# Altium PCB PCB_EXAMPLE.PcbDoc
Units mm, origin at the board's own origin, x right, y up, seen from the top; angles counter-clockwise.
Board outline 184 x 161.42 mm, 2 copper layers (Top Layer, Bottom Layer); 54 components, 42 nets, 224 pads, 11 vias.
Unrouted connection lines stored in the file: 49.
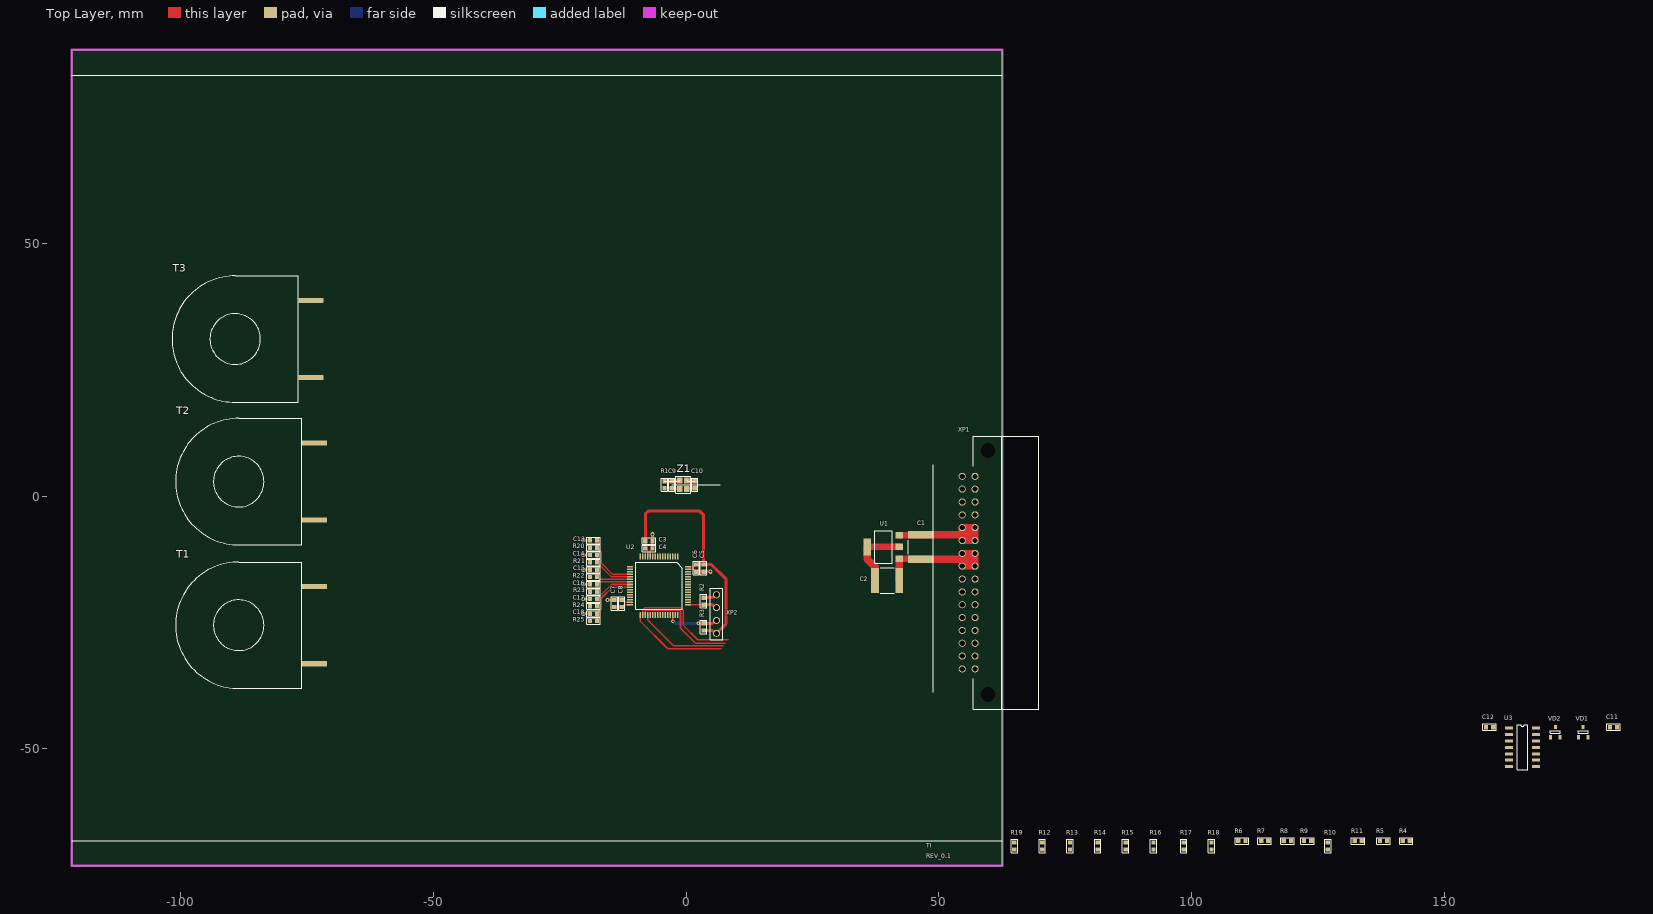
[diagram p0: Top Layer view]
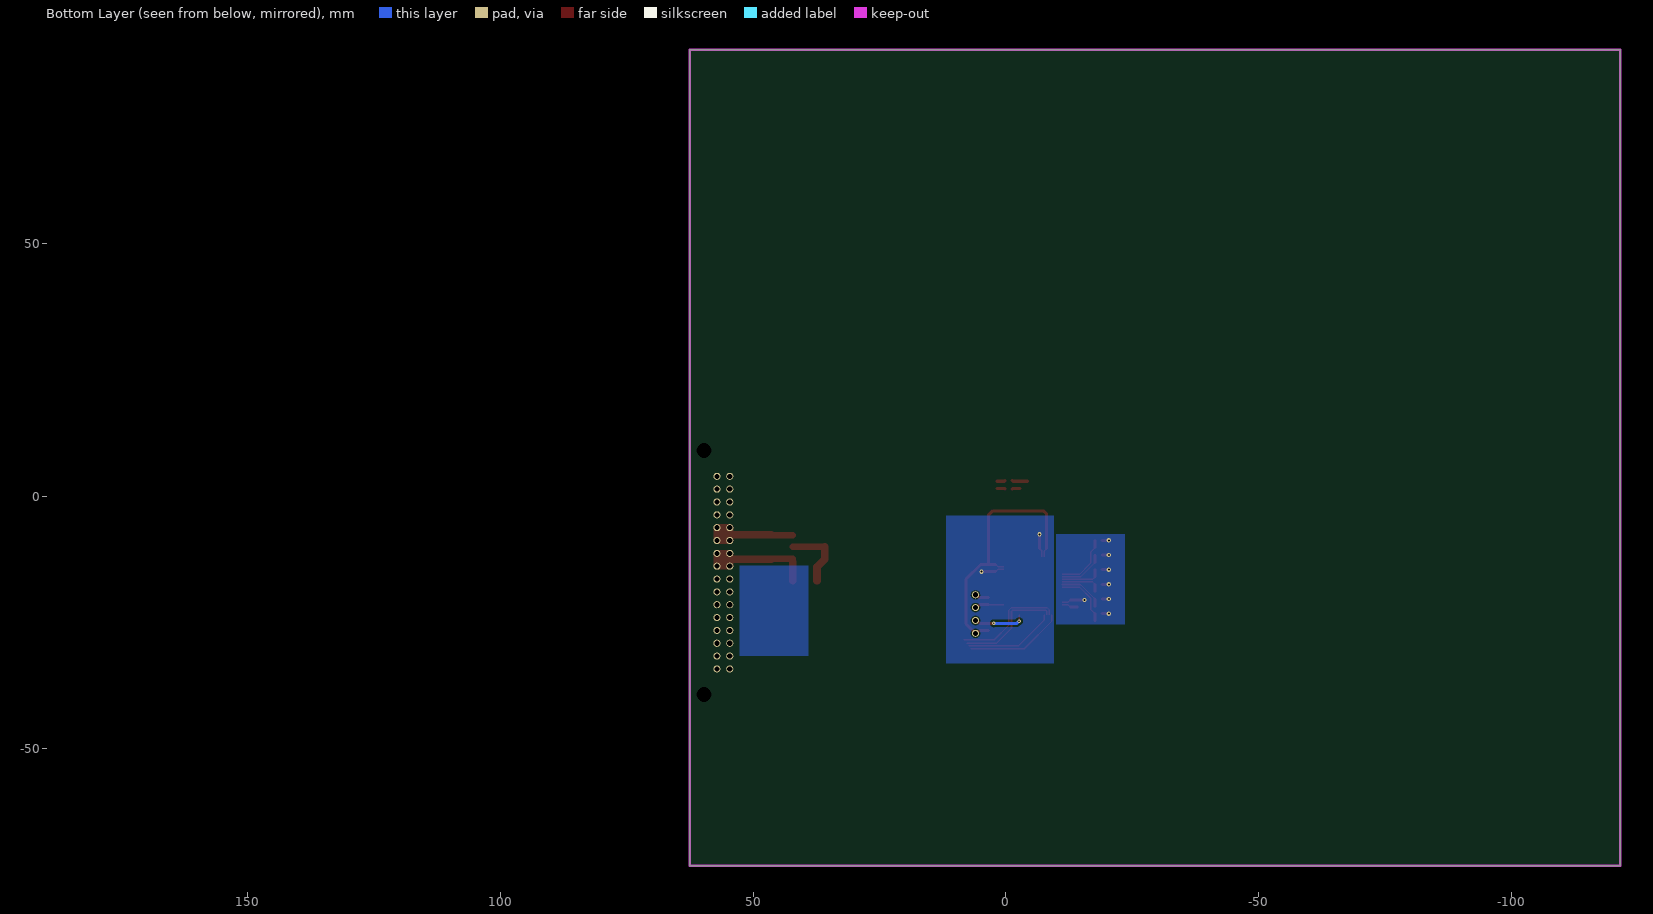
[diagram p1: Bottom Layer view, seen from below]

## Layer stack, top to bottom
Top Solder: solder mask 0.0102, Solder Resist, Dk 3.5
Top Layer: signal copper 0.0356
Dielectric 1: dielectric 0.32, FR-4, Dk 4.8
Bottom Layer: signal copper 0.0356
Bottom Solder: solder mask 0.0102, Solder Resist, Dk 3.5

## Board outline
-121.496,-73.136 -121.496,88.286 62.504,88.286 62.504,-71.986 62.504,-73.136

## Design rules (kind name [scope] priority, off if disabled: settings)
BoardOutlineClearance [All] p1: gap=0.3 ignorepadtopadclearanceinfootprint=FALSE
Clearance Clearance_MultiLayerPad [OnLayer('Multi-Layer') and IsPad] p1: gap=0.2 ignorepadtopadclearanceinfootprint=FALSE except(0: Arc-Hole Track-Hole SMDPad-Hole THPad-Hole Via-Hole Fill-Hole Poly-Hole Region-Hole Text-Hole)
Clearance Clearance_Polygon [InPolygon] p2: gap=0.4 ignorepadtopadclearanceinfootprint=FALSE except(0: Arc-Hole Track-Hole SMDPad-Hole THPad-Hole Via-Hole Fill-Hole Poly-Hole Region-Hole Text-Hole)
Clearance [All] p3: gap=0.1 ignorepadtopadclearanceinfootprint=FALSE except(0: Arc-Hole Track-Hole SMDPad-Hole THPad-Hole Via-Hole Fill-Hole Poly-Hole Region-Hole Text-Hole)
ComponentClearance [All] p1: gap=0 collisioncheckmode=3 verticalgap=0 showdistances=FALSE
DiffPairsRouting [All] p1: maxlimit=0.3 minlimit=0.1 mostfreqgap=0.15 toplayer_minwidth=0.1 toplayer_maxwidth=0.3 toplayer_prefwidth=0.15 bottomlayer_minwidth=0.1 bottomlayer_maxwidth=0.3 bottomlayer_prefwidth=0.15 maxuncoupledlength=12.7
Height [All] p1: minheight=0 maxheight=50 prefheight=12.7
HoleSize [All] p1: absolutevalues=TRUE maxlimit=10 minlimit=0.3 maxpercent=80.000 minpercent=20.000
HoleToHoleClearance [All] p1: gap=0.3 allowstackedmicrovias=TRUE
MinimumSolderMaskSliver [All] p1: minsoldermaskwidth=0.2
PlaneClearance [All] p1: clearance=0.5
PlaneConnect [All] p1: planeconnectstyle=Relief reliefexpansion=0.5 reliefentries=4 reliefconductorwidth=0.2 reliefairgap=0.2
PolygonConnect PolygonConnect_PadGND [InNet('GND') and IsPad] p1: connectstyle=Relief reliefconductorwidth=0.2 reliefentries=4 polygonreliefangle="90 Angle" airgapwidth=0.2
PolygonConnect PolygonConnect_Via [IsVia] p2: connectstyle=Direct reliefconductorwidth=0.254 reliefentries=4 polygonreliefangle="90 Angle" airgapwidth=0.254
PolygonConnect [All] p3: connectstyle=Relief reliefconductorwidth=0.2 reliefentries=4 polygonreliefangle="90 Angle" airgapwidth=0.2
RoutingVias [All] p1: holewidth=0.2 width=0.4 viastyle="Through Hole" minholewidth=0.2 minwidth=0.4 maxholewidth=0.5 maxwidth=1.2
SilkToSolderMaskClearance [IsPad] p1: minsilkscreentomaskgap=0.2 clearancetoexposedcopper=TRUE
SolderMaskExpansion [All] p1: expansion=0.075 istentingtop=FALSE
Width [All] p1: maxlimit=10 minlimit=0.1 preferedwidth=0.1
21 further rules are at their usual default settings.

## Classes and differential pairs
component class U_TI_POW: C1 C2 C3 C4 C5 C6 C7 C8 U1 XP1
component class U_TI_MCU: C9 C10 R1 R2 R3 R? U2 XP2 Z1 Z?
component class U_TI_ADC_VOLTAGE: C11 C12 C13 C14 C15 C16 C17 C18 R4 R5 R6 R7 R8 R9 R10 R11 R12 R13 R14 R15 R16 R17 R18 R19 R20 R21 R22 R23 R24 R25 R? T1 T2 T3 U3 VD1 VD2

## Components (designator, comment, footprint, x,y, rotation, side; value= is the part's Value field where it differs from the comment)
C1 "Cap_2220" "CAP: 2220" 46.425,-12.445 r180 top value=10μF
C2 "Cap_2220" "CAP: 2220" 42.175,-16.695 r270 top value=10μF
C3 "Cap_0603" "CAP: 0603" -7.35,-8.9 r180 top value=4.7μF
C4 "Cap_0603" "CAP: 0603" -7.35,-10.35 r180 top value=0.1μF
C5 "Cap_0603" "CAP: 0603" 3.475,-14.225 r90 top value=4.7μF
C6 "Cap_0603" "CAP: 0603" 2.025,-14.225 r90 top value=0.1μF
C7 "Cap_0603" "CAP: 0603" -14.175,-21.225 r270 top value=1μF
C8 "Cap_0603" "CAP: 0603" -12.725,-21.225 r270 top value=0.01μF
C9 "Cap_0603" "CAP: 0603" -2.825,2.25 r90 top value=20pF
C10 "Cap_0603" "CAP: 0603" 1.725,2.25 r90 top value=20pF
C11 "Cap_0603" "CAP: 0603" 183.442,-45.685 r0 top value=??μF
C12 "Cap_0603" "CAP: 0603" 158.942,-45.685 r0 top value=??μF
C13 "Cap_0603" "CAP: 0603" -18.306,-8.743 r180 top value=??μF
C14 "Cap_0603" "CAP: 0603" -18.306,-11.643 r180 top value=??μF
C15 "Cap_0603" "CAP: 0603" -18.306,-14.543 r180 top value=??μF
C16 "Cap_0603" "CAP: 0603" -18.306,-17.443 r180 top value=??μF
C17 "Cap_0603" "CAP: 0603" -18.306,-20.343 r180 top value=??μF
C18 "Cap_0603" "CAP: 0603" -18.306,-23.243 r180 top value=??μF
R1 "Resistor_0603" "RES: 0603" -4.275,2.25 r270 top value=390
R2 "Resistor_0603" "RES: 0603" 3.475,-20.775 r270 top value=10K
R3 "Resistor_0603" "RES: 0603" 3.475,-25.855 r270 top value=10K
R4 "Resistor_0603" "RES: 0603" 142.441,-68.185 r0 top value=??R
R5 "Resistor_0603" "RES: 0603" 137.941,-68.185 r0 top value=63.4K
R6 "Resistor_0603" "RES: 0603" 109.941,-68.185 r0 top value=158K
R7 "Resistor_0603" "RES: 0603" 114.441,-68.185 r0 top value=158K
R8 "Resistor_0603" "RES: 0603" 118.941,-68.185 r0 top value=158K
R9 "Resistor_0603" "RES: 0603" 122.941,-68.185 r0 top value=158K
R10 "Resistor_0603" "RES: 0603" 126.941,-69.185 r90 top value=63.4K
R11 "Resistor_0603" "RES: 0603" 132.941,-68.185 r0 top value=63.4K
R12 "Resistor_0603" "RES: 0603" 70.442,-69.185 r90 top value=158K
R13 "Resistor_0603" "RES: 0603" 75.942,-69.185 r90 top value=158K
R14 "Resistor_0603" "RES: 0603" 81.442,-69.185 r90 top value=158K
R15 "Resistor_0603" "RES: 0603" 86.942,-69.185 r90 top value=158K
R16 "Resistor_0603" "RES: 0603" 92.441,-69.185 r90 top value=63.4K
R17 "Resistor_0603" "RES: 0603" 98.441,-69.185 r90 top value=63.4K
R18 "Resistor_0603" "RES: 0603" 103.941,-69.185 r90 top value=63.4K
R19 "Resistor_0603" "RES: 0603" 64.942,-69.185 r90 top value=??R
R20 "Resistor_0603" "RES: 0603" -18.306,-10.193 r180 top value=??R
R21 "Resistor_0603" "RES: 0603" -18.306,-13.093 r180 top value=??R
R22 "Resistor_0603" "RES: 0603" -18.306,-15.993 r180 top value=??R
R23 "Resistor_0603" "RES: 0603" -18.306,-18.893 r180 top value=??R
R24 "Resistor_0603" "RES: 0603" -18.306,-21.793 r180 top value=??R
R25 "Resistor_0603" "RES: 0603" -18.306,-24.693 r180 top value=??R
T1 "AC-1005" AC-1005 -88.475,-25.525 r90 top
T2 "AC-1005" AC-1005 -88.475,2.875 r90 top
T3 "AC-1005" AC-1005 -89.175,31.075 r90 top
U1 "MCP600LD1117S33CTR4" SOT-223-3 39.025,-10.045 r90 top
U2 "STM32F030R8T6TR" LQFP-64 -5.35,-17.725 r270 top
U3 "MCP6004" SOIC-14 165.442,-49.685 r0 top
VD1 "BAV99" SOT-23-3 177.442,-46.685 r0 top
VD2 "BAV99" SOT-23-3 171.942,-46.685 r0 top
XP1 "DS1118-32M-R23" DS1118-32M-R23 57.165,-34.175 r90 top
XP2 "PLS-6 (DS1021-1x6)" "PLS-4 (DS1021-1x4)" 6.02,-23.315 r0 top
Z1 "ECS-320-10-36B2-CTN-TR" "OSC: 2520" 0.15,1.4 r90 top value=32MHz

## Footprints (in the part's own frame and the unit in brackets; to place one, negate y for a bottom-side part, rotate by r counter-clockwise, add the part's x,y. Pads: shape width x height; smd on the part's side, far side on the other; paste and mask are expansions set on the pad)
AC-1005 [mm] "AC-1005"
  rect 1x5 smd: 1(-7.62,-15) 2(7.62,-15)
  silkscreen extent -12.5,-12.5 12.5,12.5, body extent -11.91,-17.5 11.91,11.93, height 9.8
"CAP: 0603" [mm]
  rect 0.85x0.85 smd: 1(-0.7,0) 2(0.7,0)
  silkscreen extent -1.33,-0.63 1.33,0.63, body extent -0.8,-0.4 0.8,0.4, height 0.3
"CAP: 2220" [mm]
  rect 5x1.5 smd: 1(0,0) 2(0,-4.8)
  silkscreen extent -2.5,-3.75 2.5,-1, body extent -2.5,-5.25 2.5,0.45, height 2.3
DS1118-32M-R23 [mm] "DS1118-32M-R23"
  round 1.4 hole 1: 1(0,0) 2(2.54,0) 3(5.08,0) 4(7.62,0) 5(10.16,0) 6(12.7,0) 7(15.24,0) 8(17.78,0) 9(20.32,0) 10(22.86,0) 11(25.4,0) 12(27.94,0) 13(30.48,0) 14(33.02,0) 15(35.56,0) 16(38.1,0) 17(38.1,2.54) 18(35.56,2.54) 19(33.02,2.54) 20(30.48,2.54) 21(27.94,2.54) 22(25.4,2.54) 23(22.86,2.54) 24(20.32,2.54) 25(17.78,2.54) 26(15.24,2.54) 27(12.7,2.54) 28(10.16,2.54) 29(7.62,2.54) 30(5.08,2.54) 31(2.54,2.54) 32(0,2.54)
  round 2 hole 3: ""(-5.08,-2.54) ""(43.18,-2.54)
  silkscreen extent -7.95,-12.64 46.05,0.36, body extent -7.95,-12.64 46.05,2.84, height 6.87
LQFP-64 [mm] "LQFP-64"
  rect 1.2x0.3 smd: 1(-5.75,3.75) 2(-5.75,3.25) 3(-5.75,2.75) 4(-5.75,2.25) 5(-5.75,1.75) 6(-5.75,1.25) 7(-5.75,0.75) 8(-5.75,0.25) 9(-5.75,-0.25) 10(-5.75,-0.75) 11(-5.75,-1.25) 12(-5.75,-1.75) 13(-5.75,-2.25) 14(-5.75,-2.75) 15(-5.75,-3.25) 16(-5.75,-3.75) 33(5.75,-3.75) 34(5.75,-3.25) 35(5.75,-2.75) 36(5.75,-2.25) 37(5.75,-1.75) 38(5.75,-1.25) 39(5.75,-0.75) 40(5.75,-0.25) 41(5.75,0.25) 42(5.75,0.75) 43(5.75,1.25) 44(5.75,1.75) 45(5.75,2.25) 46(5.75,2.75) 47(5.75,3.25) 48(5.75,3.75)
  rect 0.3x1.2 smd: 17(-3.75,-5.75) 18(-3.25,-5.75) 19(-2.75,-5.75) 20(-2.25,-5.75) 21(-1.75,-5.75) 22(-1.25,-5.75) 23(-0.75,-5.75) 24(-0.25,-5.75) 25(0.25,-5.75) 26(0.75,-5.75) 27(1.25,-5.75) 28(1.75,-5.75) 29(2.25,-5.75) 30(2.75,-5.75) 31(3.25,-5.75) 32(3.75,-5.75) 49(3.75,5.75) 50(3.25,5.75) 51(2.75,5.75) 52(2.25,5.75) 53(1.75,5.75) 54(1.25,5.75) 55(0.75,5.75) 56(0.25,5.75) 57(-0.25,5.75) 58(-0.75,5.75) 59(-1.25,5.75) 60(-1.75,5.75) 61(-2.25,5.75) 62(-2.75,5.75) 63(-3.25,5.75) 64(-3.75,5.75)
  silkscreen extent -4.61,-4.61 4.61,4.61, body extent -6,-6 6,6, height 1.61
"OSC: 2520" [mm]
  rect 1.2x1.1 smd: 1(0,0) 2(1.7,0) 3(1.7,1.4) 4(0,1.4)
  round 0.5 on Mech1: 5(-0.075,0.025)
  round 0.5 on Top Overlay: ""(-1.275,-0.6)
  silkscreen extent -0.8,-0.75 2.5,2.15, body extent -0.45,-0.35 2.15,1.75, height 0.55
"PLS-4 (DS1021-1x4)" [mm] "PLS-4 (DS1021-1x4)"
  round 1.4 hole 1: 1(0,3.81) 2(0,1.27) 3(0,-1.27) 4(0,-3.81)
  silkscreen extent -1.27,-5.08 1.27,5.08, body extent -1.27,-5.08 1.27,5.08, height 8.61
"RES: 0603" [mm]
  rect 0.85x0.85 smd: 1(-0.7,0) 2(0.7,0)
  silkscreen extent -1.33,-0.63 1.33,0.63, body extent -0.8,-0.4 0.8,0.4, height 0.44
SOIC-14 [mm] "SOIC-14"
  rect 1.6x0.6 smd: 1(-2.7,3.81) 2(-2.7,2.54) 3(-2.7,1.27) 4(-2.7,0) 5(-2.7,-1.27) 6(-2.7,-2.54) 7(-2.7,-3.81) 8(2.7,-3.81) 9(2.7,-2.54) 10(2.7,-1.27) 11(2.7,0) 12(2.7,1.27) 13(2.7,2.54) 14(2.7,3.81)
  silkscreen extent -1.07,-4.44 1.07,4.44, body extent -3,-4.33 3,4.33, height 1.75
SOT-23-3 [mm] "SOT-23-3"
  rect 0.6x0.8 smd: 1(-0.95,-1) 2(0.95,-1) 3(0,1)
  silkscreen extent -1,-0.25 1,0.25, body extent -1.45,-1.25 1.45,1.15, height 0.96
SOT-223-3 [mm] "SOT-223-3"
  rect 1.3x1.5 smd: 1(-2.3,-3.15) 2(0,-3.15) 3(2.3,-3.15)
  rect 3.3x1.5 smd: 4(0,3.15)
  silkscreen extent -3.25,-1.75 3.25,1.75, body extent -3.25,-3.5 3.25,3.5, height 1.81

## Part data
C1 C2: Package/Case=2220, Temperature=-55...+125°C(-55...+85°C), TypeDielectric=X7R(X5R), Voltage=16V, Product Category=Capacitors
C3 C5: Package/Case=0603, Temperature=-55...+125°C(-55...+85°C), TypeDielectric=X7R(X5R), Voltage=25V, Product Category=Capacitors
C4 C6 C7: Package/Case=0603, Temperature=-55...+125°C(-55...+85°C), TypeDielectric=X7R(X5R), Voltage=16V, Product Category=Capacitors
C8 C9 C10: Package/Case=0603, Temperature=-55...+125°C(-55...+85°C), TypeDielectric=X7R(X5R), Voltage=50V, Product Category=Capacitors
C11 C12 C13 C14 C15 C16 C17 C18: Package/Case=0603, Temperature=-55...+125°C(-55...+85°C), TypeDielectric=X7R(X5R), Voltage=??V, Product Category=Capacitors
R1 R2 R3: Package/Case=0603, Power=0.1W, Temperature=-55...+125°C, Tolerance=±1%, Product Category=Resistors
R4 R5 R6 R7 R8 R9 R10 R11 R12 R13 R14 R15 R16 R17 R18 R19 R20 R21 R22 R23 R24 R25: Package/Case=0603, Power=0.1W, Temperature=-55...+125°C, Tolerance=±5%, Product Category=Resistors
T1 T2 T3: "Current Transformer, primary current: 5A", Manufacturer=Talema, Analogue=CST-1005(https://eu.mouser.com/datasheet/2/410/CST_1005-1892657.pdf), Datasheet=https://static.chipdip.ru/lib/884/DOC003884697.pdf, HelpURL=https://www.chipdip.ru/product/ac-1005, Product Category="Current Transformers"
U1: library part LD1117S33CTR, "LDO Voltage Regulator 3.3V 0.8A Positive", Manufacturer=STMicroelectronics, Package/Case=SOT-223-3, Datasheet=https://eu.mouser.com/datasheet/2/389/cd00000544-1795431.pdf, HelpURL=https://eu.mouser.com/ProductDetail/STMicroelectronics/LD1117S33CTR?qs=8u%2FLf1IQwKF9meFZLHfRog%3D%3D, Product Category="Voltage Regulators"
U2: "MCU Mainstream Arm Cortex-M0 Value line MCU 64 Kbytes of Flash , 48 MHz CPU", Manufacturer=STMicroelectronics, Package/Case=LQFP-64, Datasheet=https://www.st.com/resource/en/datasheet/stm32f030r8.pdf, HelpURL=https://eu.mouser.com/ProductDetail/STMicroelectronics/STM32F030R8T6TR?qs=s5SkPsIz10%252B%252B1w15QiyTpQ%3D%3D, Product Category=Microcontrollers
U3: "1 MHz, Low-Power Op Amp", Manufacturer=Microchip, Package/Case=SOIC-14, Datasheet=https://eu.mouser.com/ProductDetail/Microchip-Technology-Atmel/MCP6004-I-SL?qs=n%2FfJlMG9rCZ2%2F%2FCryvZ52w%3D%3D, HelpURL=https://eu.mouser.com/ProductDetail/Microchip-Technology-Atmel/MCP6004-I-SL?qs=n%2FfJlMG9rCZ2%2F%2FCryvZ52w%3D%3D, Product Category="Operational Amplifiers"
VD1 VD2: "High-speed switching diode", Manufacturer=Nexperia, Package/Case=SOT-23, Datasheet=https://eu.mouser.com/datasheet/2/916/BAV99_SER-1370693.pdf, HelpURL=https://eu.mouser.com/ProductDetail/Nexperia/BAV99235?qs=me8TqzrmIYWUP4h8SbZlfQ%3D%3D, Product Category=Diodes
XP1: "DIN 41612 Connector", Manufacturer=Connfly, Analogue="HARTING 09221326951(https://eu.mouser.com/ProductDetail/HARTING/09221326951?qs=Afqhj6cPmO9f0oVZo6yWiA%3D%3D)", Datasheet=http://en.connfly.group/static/upload/file/pdf/DS1118.pdf, HelpURL=https://www.chipdip.by/product/din41612r-ds1118-32m-r23, Product Category=Connectors
XP2: library part "PLS-4 (DS1021-1x4)", "Board to Board, Surface Mount, Single row, 6 Positions, 2.54mm, Vertical.", Manufacturer=Connfly, Datasheet=https://static.chipdip.ru/lib/977/DOC005977245.pdf, HelpURL=https://www.chipdip.by/product/pls-4, Product Category=Connectors
Z1: "Crystal 32.000 MHz 10 pF +/-10 +/-20 -40 +85 C +/-2 ppm Max.", Manufacturer=ECS, Package/Case=2520, Temperature=-40...+85°C, Datasheet=https://eu.mouser.com/datasheet/2/122/ECX_2236B2-2400583.pdf, HelpURL=https://eu.mouser.com/ProductDetail/ECS/ECS-320-10-36B2-CTN-TR?qs=QNEnbhJQKvbusIFiAH6chw%3D%3D, Product Category=Crystals

## Via types
v1: diameter 0.85, hole 0.4, Top Layer to Bottom Layer, 9 vias
v2: diameter 0.7, hole 0.35, Top Layer to Bottom Layer, 2 vias

## Nets (pads, with @x,y where several pads share a name; then routed paths per layer and width w, separated by ;. In a path a pad name is that pad's centre, name@x,y a point inside that pad or via, vN(x,y) a via of type N, cw(c..) or ccw(c..) an arc to the next point about the centre after c; other vN are vias at no path point)
+3V3: C2.2 C3.2 C4.2 C5.2 C6.2 C7.2 C8.2 R3.2 U1.2 U1.4 U2.1 U2.7 U2.13 U2.32 U2.64 XP2.4 | length 70.5
  Top Layer w0.3: C8.2 -12.275,-21.475 U2.32 ; C4.2 -7.6,-10.8 U2.13 ; U2.64 1.575,-13.975 C6.2
  Top Layer w0.6: C7.2 C8.2 ; C4.2 -8.05,-3.55 -7.4,-2.9 2.6,-2.9 3.475,-3.775 C5.2 ; C6.2 C5.2 ; R3.2 5.233,-26.555 5.804,-27.125 XP2.4 7.922,-25.223 7.922,-16.461 4.986,-13.525 C5.2
  Top Layer w1.3: U1.4 U1.2
  Top Layer w1.5: U1.4 35.875,-12.516 37.375,-14.016 C2.2
+5V: C1.2 U1.3 U3.4 XP1.11 XP1.12 XP1.21 XP1.22 | length 22.5
  Top Layer w1.2: C1.2@46.325,-7.745 C1.2
  Top Layer w1.3: U1.3 C1.2@46.325,-7.745
  Top Layer w1.4: XP1.22 54.625,-7.505 XP1.21 XP1.12 XP1.11 XP1.22
  Top Layer w1.5: C1.2 54.485,-7.645
ADC_IN4: C13.1 R20.1 U2.20 | length 11.4
  Top Layer w0.3: R20.1@-17.606,-10.207 -16.757,-11.056 -16.757,-13.249 -14.531,-15.475 U2.20
  Top Layer w0.6: R20.1@-17.606,-10.182 C13.1
ADC_IN5: C14.1 R21.1 U2.21 | length 9.2
  Top Layer w0.3: R21.1@-17.606,-13.134 R21.1 ; R21.1@-17.606,-13.107 -14.738,-15.975 U2.21
  Top Layer w0.6: R21.1 C14.1
ADC_IN6: C15.1 R22.1 U2.22 | length 8.2
  Top Layer w0.3: R22.1@-17.606,-16.007 -17.138,-16.475 U2.22
  Top Layer w0.6: R22.1 C15.1
ADC_IN7: C16.1 R23.1 U2.23 | length 8.2
  Top Layer w0.3: C16.1 -17.138,-16.975 U2.23
  Top Layer w0.6: R23.1 C16.1
ADC_IN14: C17.1 R24.1 U2.24 | length 9.1
  Top Layer w0.3: C17.1 -14.738,-17.475 U2.24
  Top Layer w0.6: R24.1 C17.1
ADC_IN15: C18.1 R25.1 U2.25 | length 11.4
  Top Layer w0.3: C18.1 -16.757,-22.394 -16.757,-20.201 -14.531,-17.975 U2.25
  Top Layer w0.6: R25.1 C18.1
GND: C1.1 C2.1 C3.1 C4.1 C5.1 C6.1 C7.1 C8.1 C9.1 C10.2 C11.2 C12.2 C13.2 C14.2 C15.2 C16.2 C17.2 C18.2 R2.1 U1.1 U2.12 U2.31 U2.60 U2.63 U3.11 XP1.9 XP1.10 XP1.23 XP1.24 XP2.1 Z1.2 Z1.4 | length 54.2
  Top Layer w0.3: C8.1 -12.275,-20.975 U2.31 ; U2.12 -7.1,-10.8 C4.1 ; U2.63 1.575,-14.475 C6.1
  Top Layer w0.6: v1(-20.356,-23.243) C18.2 ; v1(-20.356,-20.343) C17.2 ; v1(-20.356,-17.443) C16.2 ; v1(-20.356,-14.543) C15.2 ; v1(-20.356,-11.643) C14.2 ; v1(-20.356,-8.743) C13.2 ; v1(-15.525,-20.525) C7.1 C8.1 ; C4.1 C3.1 v1(-6.65,-7.55) ; C9.1 -1.4,1.55 Z1.4 ; Z1.2 0.3,2.95 C10.2 ; C6.1 C5.1 v1(4.825,-14.925) ; R2.1 5.234,-20.075 5.804,-19.505 XP2.1
  Top Layer w1.3: U1.1 46.325,-12.345 C1.1
  Top Layer w1.4: XP1.24 XP1.23 XP1.10 XP1.9 XP1.24
  Top Layer w1.5: C2.1 42.175,-12.995 ; C1.1 54.485,-12.445
NetC9_2: C9.2 R1.1 Z1.3 | length 3.1
  Top Layer w0.6: R1.1 C9.2 -1.4,2.95 Z1.3
NetC11_1: C11.1 R4.1
NetC12_1: C12.1 R19.1
NetR4_2: R4.2 R5.2 U3.1
NetR5_1: R5.1 R11.2 U3.2 VD1.1 VD1.2
NetR6_2: R6.2 R7.1
NetR7_2: R7.2 R8.1
NetR8_2: R8.2 R9.1
NetR9_2: R9.2 R10.1
NetR10_2: R10.2 R11.1
NetR12_2: R12.2 R13.1
NetR13_2: R13.2 R14.1
NetR14_2: R14.2 R15.1
NetR15_2: R15.2 R16.1
NetR16_2: R16.2 R17.1
NetR17_2: R17.2 R18.2 U3.6 VD2.1 VD2.2
NetR18_1: R18.1 R19.2 U3.7
NetU3_3: U3.3 VD1.3
NetU3_5: U3.5 VD2.3
OSC_IN: C10.1 U2.5 Z1.1 | length 1.6
  Top Layer w0.6: Z1.1 0.3,1.55 C10.1
OSC_OUT: R1.2 U2.6
OUT_1: R20.2
OUT_2: R21.2
OUT_3: R22.2
OUT_4: R23.2
OUT_5: R24.2
OUT_6: R25.2
SPI2_MISO: U2.35 XP1.3 XP1.30 | length 21.4
  Top Layer w0.3: U2.35 -8.1,-22.73 -7.895,-22.525 -1.305,-22.525 -1.1,-22.73 -1.1,-26.126 1.864,-29.09 7.775,-29.09
SPI2_MOSI: U2.36 XP1.2 XP1.31 | length 18
  Top Layer w0.3: U2.36 -7.6,-24.437 -2.464,-29.573 7.36,-29.573
SPI2_NSS: U2.33 XP1.1 XP1.32 | length 19.6
  Top Layer w0.3: U2.33 -9.1,-24.702 -3.606,-30.196 6.987,-30.196
SPI2_SCK: U2.34 XP1.4 XP1.29 | length 22.4
  Top Layer w0.3: U2.34 -8.6,-22.523 -8.102,-22.025 -1.098,-22.025 -0.6,-22.523 -0.6,-25.484 2.311,-28.395 8.302,-28.395
SWCLK: R2.2 U2.49 XP2.2 | length 5.9
  Top Layer w0.3: U2.49 R2.2
  Top Layer w0.6: R2.2 5.233,-21.475 5.804,-22.045 XP2.2
SWDIO: R3.1 U2.46 XP2.3 | length 10.3
  Top Layer w0.3: v2(-2.6,-24.725) U2.46
  Top Layer w0.6: v2(2.4,-25.155) R3.1 5.234,-25.155 5.804,-24.585 XP2.3
  Bottom Layer w0.6: v2(-2.6,-24.725) -2.573,-24.725 -2.143,-25.155 v2(2.4,-25.155)
pads on no net: R6.1 R12.1 T1.1 T1.2 T2.1 T2.2 T3.1 T3.2 U2.2 U2.3 U2.4 U2.8 U2.9 U2.10 U2.11 U2.14 U2.15 U2.16 U2.17 U2.18 U2.19 U2.26 U2.27 U2.28 U2.29 U2.30 U2.37 U2.38 U2.39 U2.40 U2.41 U2.42 U2.43 U2.44 U2.45 U2.47 U2.48 U2.50 U2.51 U2.52 U2.53 U2.54 U2.55 U2.56 U2.57 U2.58 U2.59 U2.61 U2.62 U3.8 U3.9 U3.10 U3.12 U3.13 U3.14 XP1. XP1.5 XP1.6 XP1.7 XP1.8 XP1.13 XP1.14 XP1.15 XP1.16 XP1.17 XP1.18 XP1.19 XP1.20 XP1.25 XP1.26 XP1.27 XP1.28 Z1. Z1.5

## Polygon pours and split planes (outlines as drawn)
GND on Bottom Layer "GND_L02_P002" (solid, pour order 2): 39.131,-13.782 52.641,-13.782 52.641,-31.575 39.131,-31.575
GND on Bottom Layer "GND_L02_P001" (solid, pour order 1): -9.475,-3.925 11.825,-3.925 11.825,-33.025 -9.475,-33.025
GND on Bottom Layer "GND_L02_P000" (solid, pour order 0): -23.475,-7.525 -9.965,-7.525 -9.965,-25.318 -23.475,-25.318

## Keep-outs
Keep-Out Layer:
  lines w0.5: -121.496,-73.136 -121.496,88.286 62.504,88.286 62.504,-73.136 -121.496,-73.136

## Other copper
Top Layer:
  rectangle net GND: 54.625,-13.855 57.165,-11.315
  rectangle net +5V: 54.625,-8.775 57.165,-6.235

## Silkscreen, mask and mechanical layers (free items; w line width, h text height)
Top Overlay:
  lines w0.05: -4.275,2.95 -2.825,2.95 -1.4,2.95 -1.25,3.1 ; -2.825,2.25 6.725,2.25 ; 0.15,3.1 0.3,2.95 1.725,2.95 ; 48.925,-38.775 48.925,6.225
  lines w0.2: -121.496,-68.136 62.504,-68.136 ; -121.496,83.286 62.504,83.286
  text "TI" at 47.504,-69.886 h1.5
  text "REV_0.1" at 47.504,-71.886 h1.5